# Altium PCB Medusa-AI-coral-dev.PcbDoc (part 2 of 2)
Units mil, origin at the board's own origin, x right, y up, seen from the top; angles counter-clockwise.
Board outline 7750 x 7750 mil, 4 copper layers (Top Layer, Layer 1, Layer 2, Bottom Layer), stack 23.756 mil thick; 116 components, 91 nets, 573 pads, 231 vias.
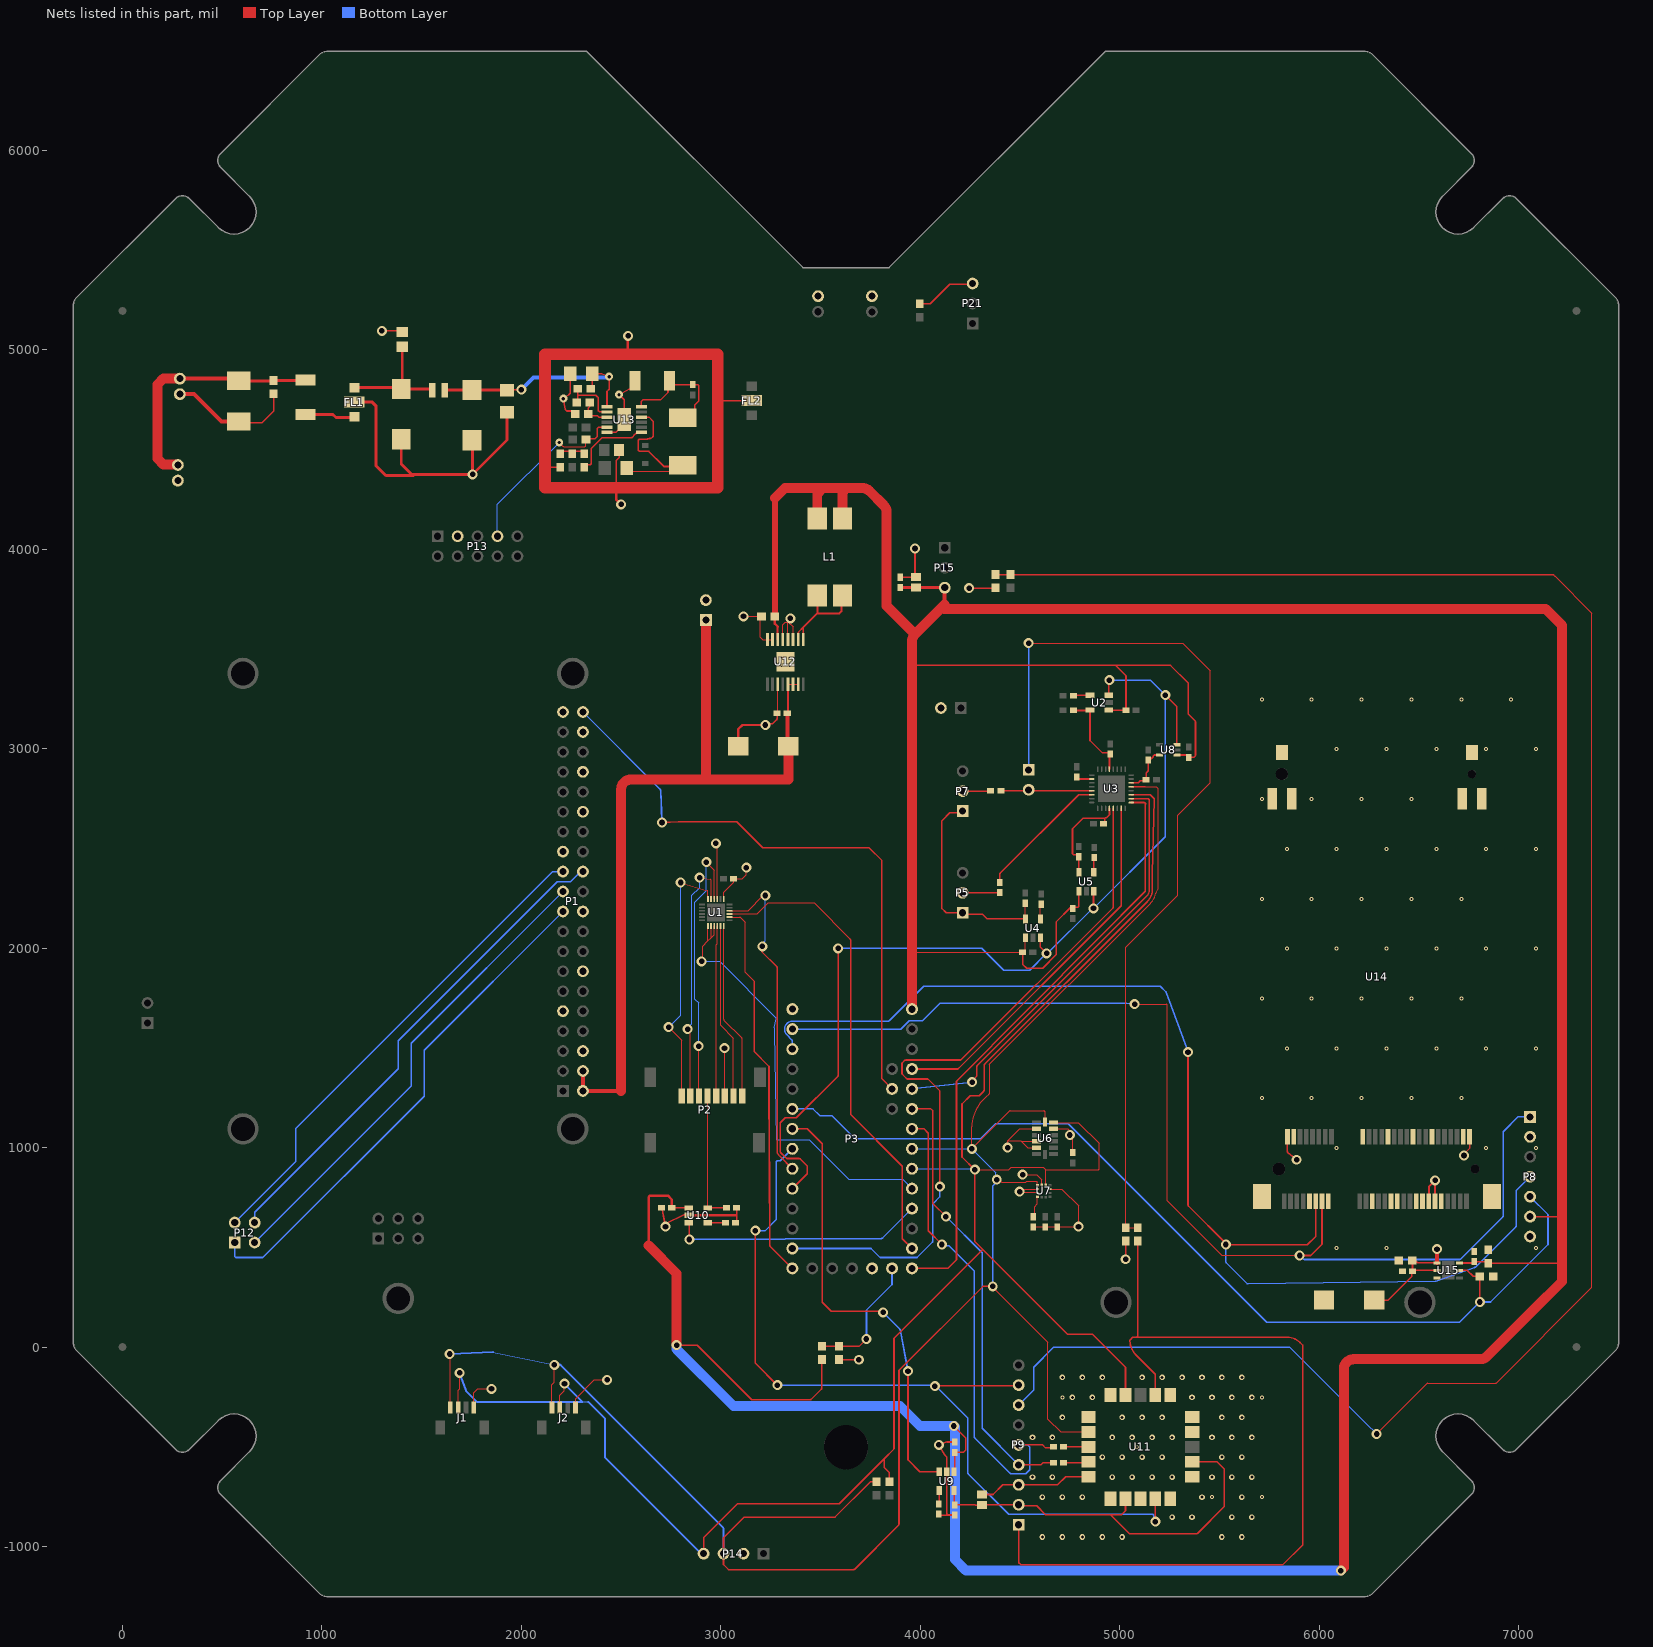
[diagram p4: the nets of this part, all layers, seen from the top]

## Via types
v1: diameter 28, hole 15, Top Layer to Bottom Layer, tented both sides, 61 vias
v2: diameter 50, hole 28, Top Layer to Bottom Layer, tented both sides, 60 vias
v3: diameter 20, hole 10, Top Layer to Bottom Layer, tented both sides, 59 vias
v4: diameter 50, hole 28, Top Layer to Bottom Layer, 40 vias
v5: diameter 40, hole 16, Top Layer to Bottom Layer, tented both sides, 5 vias
v6: diameter 19.68, hole 7.87, Top Layer to Bottom Layer, 4 vias
v7: diameter 38, hole 16, Top Layer to Bottom Layer, tented both sides, 2 vias

## Nets (pads, with @x,y where several pads share a name; then routed paths per layer and width w, separated by ;. In a path a pad name is that pad's centre, name@x,y a point inside that pad or via, vN(x,y) a via of type N, cw(c..) or ccw(c..) an arc to the next point about the centre after c; other vN are vias at no path point) (continued)
DGND: C1.2 C2.1 C3.2 C18.2 C20.1 C21.2 C22.2 C25.2 C26.2 C27.2 C28.2 C29.1 C30.1 C31.1 C34.1 C35.2 C36.2 C37.1 C38.1 C39.1 C40.2 C41.2 C42.1 C43.1 C44.1 C46.1 C47.2 C48.1 C49.2 C50.2 D2.2 D3.A FL1.2_4 FL2.2_4 J1.1 J2.1 P1.6 P1.9 P1.14 P1.20 P1.25 P1.30 P1.34 P1.39 P2.6 P3.GND P4.2 P6.2 P8.7 P9.3 P13.3 P14.2 P20.2 P21.3 P24.2 P25.2 P33.2 R2.1 R4.1 R7.1 R14.1 R16.2 R18.1 U1.13 U1.15 U6.2 U6.4 U6.5 U6.12 U7.2 U7.3 U7.9 U7.12 U9.2 U10.2 U11.1 U11.4 U11.5 U11.6 U11.10 U11.11 U11.15 U11.16 U11.20 U12.3 U12.4 U12.5 U12.7 U12.8 U12.11 U12.17 U13.6 U13.13 U14.4 U14.9 U14.15 U14.18 U14.21 U14.26 U14.27 U14.29 U14.34 U14.35 U14.37 U14.40 U14.43 U14.50 U14.53 U14.54 U14.S1_1 U14.S1_2 U14.S1_3 U14.S2_1 U14.S2_2 U14.S2_3 U15.3 | length 10133
  Top Layer w6: J1.1@1761.5,-303.94 1761.5,-228.5 1780,-210 v4(1850,-210) ; J2.1@2271.26,-303.94 2271.26,-258.74 2365,-165 v4(2430,-165) ; v2(2975,2525) 2980.68,2519.32 cw(c2976.44,2515.07) 2982.44,2515.07 U1.15@2982.44,2247.36 ; U1.13@3013.94,2247.36 3013.94,2279.53 3063.9,2329.49 C1.2@3063.9,2348.9 3108.31,2348.9 3128.31,2368.9 v2(3128.31,2403.9) ; v2(3018.31,1498.9) 3018.31,1260.51 P2.6@3019.92,1258.9 ; v4(3113.31,3663.9) 3202.44,3663.9 C37.1@3203.98,3662.36 3198.31,3656.69 3198.31,3558.9 3209.84,3547.36 U12.8@3233.9,3547.36 U12.7@3259.49,3547.36 ; C36.2@3281.85,3177.36 3285.08,3180.59 U12.11@3285.08,3322.95 ; U12.5@3310.67,3547.36 3310.67,3621.26 3323.31,3633.9 v4@3338.31,3633.9 ; U12.4@3336.26,3547.36 3336.26,3631.85 v4@3338.31,3633.9 ; v4(3348.31,3653.9) 3343.51,3639.96 cw(c3337.84,3641.91) 3342.08,3637.67 v4@3338.31,3633.9 ; U12.3@3361.85,3547.36 3361.85,3610.35 v4@3338.31,3633.9 ; v2(4438.31,1000) 4438.31,1033.9 ; v2@4503.31,858.9 4508.31,858.9 v2(4513.31,863.9) 4583.31,863.9 4609.09,838.11 U7.12@4609.09,813.7 ; C20.1@4567.44,601.77 C22.2@4627.44,601.77 C21.2@4687.44,601.77 4689.57,603.9 v2(4793.31,603.9) 4793.31,707.64 4708.9,792.05 U7.9@4650.43,792.05 ; U6.5@4582.44,999.37 4537.83,999.37 4506.34,1030.87 ; U6.4@4582.44,1030.87 4506.34,1030.87 ; U6.2@4582.44,1093.86 4498.27,1093.86 4438.31,1033.9 ; U7.3@4587.44,772.36 4584.54,775.27 4501.94,775.27 v2(4498.31,778.9) 4511.46,792.05 U7.2@4587.44,792.05 ; U6.12@4668.86,1093.86 4738.35,1093.86 4763.31,1068.9 v2@4763.31,1063.15 ; v2(4750.1,1063.15) v2@4763.31,1063.15 ; C18.2@4763.31,974.49 v2@4763.31,1063.15 ; 4438.31,1033.9 4503.31,1033.9 4506.34,1030.87
  Top Layer w8: D2.2@555,4635 700,4635 757.44,4692.44 C42.1@757.44,4778.9 ; v4(1300,5095) 1397.2,5095 C43.1@1402.44,5089.76 ; C41.2@1752.44,4546.38 C41.2@1755,4543.82 ; 2097.91,4410 2099.45,4411.54 R14.1@2195,4411.54 ; C39.1@2244.88,4875 2244.88,4782.33 2239.23,4776.68 cw(c2233.59,4782.35) 2238.34,4775.91 v5(2210,4755) 2219.44,4702.56 ccw(c2227.31,4704) 2221.63,4698.37 2226.95,4693.05 2253.29,4693.05 R7.1@2268.98,4677.36 ; U13.6@2429,4586 2474.5,4586 2515,4626.5 U13.13@2515,4650 2515,4750 v5(2490,4775) D3.A@2541.66,4803.41 ; 2475,4329.12 2475,4445 2489.84,4459.84 C46.1@2489.84,4497.36 C46.1@2475,4482.52 ; 2530,4972.32 2532.5,4974.82 ; v4@2532.5,5067.5 v4(2535,5070) ; C27.2@2702.72,698.9 2704.92,689.12 ccw(c2712.92,689.12) 2705.07,687.55 v4(2722.44,603.9) v4@2727.57,618.58 ; v4@2727.59,618.61 cw(c2735.13,615.94) 2731.64,623.14 2804.99,658.48 cw(c2824.43,618.28) 2821.52,662.84 U10.2@2839.17,660.43 ; 2964.06,4750 2969.06,4745 FL2.2_4@3155,4745 ; 3073.62,660.43 3078.31,665.12 ; C30.1@3073.9,623.9 3076.55,626.55 ccw(c3070.9,632.21) 3078.9,632.21 3078.9,646.32 ; 3078.9,660.43 3078.9,646.32 ; C28.2@3078.9,698.9 3078.9,646.32 ; v4(3223.31,3118.9) 3230.31,3125.9 3260.31,3125.9 3279.51,3145.1 ccw(c3273.85,3150.75) 3281.85,3150.75 C36.2@3281.85,3177.36 ; R2.1@3591.69,-62.36 3593.23,-63.9 v4(3691.69,-63.9) ; C3.2@3898.31,3859.49 3977.4,3859.49 C2.1@3978.31,3860.4 3973.31,3865.4 v4(3973.31,4003.9) ; C38.1@3997.44,5230.83 4050.24,5230.83 4148.31,5328.9 P21.3@4268.31,5328.9 ; C29.1@4092.44,-838.07 4097.44,-843.07 C26.2@4172.44,-843.07 4170.47,-841.1 4137.13,-841.1 4132.44,-836.42 U9.2@4132.44,-625.24 4132.44,-551.25 4124.38,-543.18 ; 4124.35,-543.16 cw(c4130.03,-537.53) 4123.13,-541.57 v2(4093.31,-491.1) 4133.62,-476.1 4171.65,-476.1 C25.2@4172.44,-476.89 ; v4(4245,3805) 4375.59,3805 R4.1@4376.69,3806.1 R4.1@4371.69,3811.1 ; C31.1@4308.31,-739.6 4364.81,-739.6 4413.31,-691.1 P9.3@4493.31,-691.1 4688.31,-691.1 4728.9,-650.51 U11.15@4843.62,-650.51 ; v2(5030,440) R18.1@5030,531.54 ; U14.S1_2@5744.39,2768.52 U14.S1_2@5764.02,2748.9 ; C48.1@6398.98,433.9 6400.95,433.9 C48.1@6416.85,417.99 ; C49.2@6416.85,378.9 6417.66,378.9 C49.2@6427.44,369.12 ; U14.35@6486.46,731.18 U14.35@6489.45,728.19 ; U14.S2_3@6815.2,2748.9 6827.44,2761.14 U14.S2_3@6822.44,2766.14 ; C34.1@6839.57,479.49 C34.1@6847.44,487.36 ; U14.54@6866.38,737.09 U14.54@6866.38,754.8 ; R16.2@6872.43,354.31 R16.2@6872.85,353.9 ; P8.7@7049.57,553.9 P8.7@7057.44,553.9
  Top Layer w12: 2475,4329.12 2475,4250 v4(2500,4225) ; 2532.5,4974.82 v4@2532.5,5067.5 ; U10.2@2844.17,660.43 3073.62,660.43 ; C35.2@3086.46,3012.36 3086.46,3097.05 3108.31,3118.9 v4(3223.31,3118.9)
  Top Layer w15: FL1.2_4@1162.44,4737.36 1252.64,4737.36 1270,4720 1270,4420 1320,4370 1460,4370 ; C40.2@1397.44,4551.38 1397.44,4427.56 1450,4375 v4(1755,4375) ; C41.2@1755,4543.82 v4(1755,4375) ; C44.1@1927.44,4687.24 1927.44,4547.44 v4(1755,4375)
  Top Layer w20: P25.2@287.44,4777.36 357.64,4777.36 495,4640 D2.2@582.44,4640
  other v1: 4612.44,-952.64 4712.44,-952.64 4812.44,-952.64 4912.44,-952.64 5012.44,-952.64 5512.44,-952.64 5612.44,-952.64 5262.44,-852.64 5362.44,-852.64 5562.44,-852.64 5662.44,-852.64 4612.44,-752.64 4712.44,-752.64 4812.44,-752.64 5412.44,-752.64 5612.44,-752.64 4562.44,-652.64 4662.44,-652.64 4962.44,-652.64 5062.44,-652.64 5162.44,-652.64 5262.44,-652.64 5462.44,-652.64 5562.44,-652.64 5662.44,-652.64 4912.44,-552.64 5012.44,-552.64 5112.44,-552.64 5212.44,-552.64 5512.44,-552.64 5612.44,-552.64 4562.44,-452.64 4662.44,-452.64 4962.44,-452.64 5062.44,-452.64 5162.44,-452.64 5262.44,-452.64 5462.44,-452.64 5562.44,-452.64 5662.44,-452.64 4712.44,-352.64 5012.44,-352.64 5112.44,-352.64 5212.44,-352.64 5512.44,-352.64 5612.44,-352.64 4762.44,-252.64 4862.44,-252.64 5362.44,-252.64 5462.44,-252.64 5562.44,-252.64 5662.44,-252.64 4712.44,-152.64 4812.44,-152.64 4912.44,-152.64 5112.44,-152.64 5212.44,-152.64 5312.44,-152.64 5412.44,-152.64 5512.44,-152.64 5612.44,-152.64
  other v3: 5462.44,-752.64 5712.44,-752.64 5087.44,-502.64 4712.44,-252.64 5712.44,-252.64 6087.44,497.36 6337.44,497.36 7087.44,497.36 6087.44,997.36 6837.44,997.36 7087.44,997.36 5712.44,1247.36 5962.44,1247.36 6212.44,1247.36 6462.44,1247.36 6712.44,1247.36 5837.44,1497.36 6087.44,1497.36 6337.44,1497.36 6587.44,1497.36 6837.44,1497.36 7087.44,1497.36 5712.44,1747.36 5962.44,1747.36 6212.44,1747.36 6462.44,1747.36 6712.44,1747.36 5837.44,1997.36 6087.44,1997.36 6337.44,1997.36 6587.44,1997.36 6837.44,1997.36 7087.44,1997.36 5712.44,2247.36 5962.44,2247.36 6212.44,2247.36 6462.44,2247.36 6712.44,2247.36 5837.44,2497.36 6087.44,2497.36 6337.44,2497.36 6587.44,2497.36 6837.44,2497.36 7087.44,2497.36 5712.44,2747.36 5962.44,2747.36 6212.44,2747.36 6462.44,2747.36 6087.44,2997.36 6337.44,2997.36 6587.44,2997.36 6837.44,2997.36 7087.44,2997.36 5712.44,3247.36 5962.44,3247.36 6212.44,3247.36 6462.44,3247.36 6712.44,3247.36 6962.44,3247.36
  other v6: 3301.81,3413.5 3345.12,3413.5 3301.81,3456.81 3345.12,3456.81
FAULT: P13.7 R8.2 U13.5 | length 915
  Top Layer w6: v7(2190,4535.12) 2190,4535 2208.24,4516.76 ccw(c2212.49,4521) 2212.49,4515 2317.5,4515 ccw(c2317.46,4521) 2323.46,4521 R8.2@2323.46,4550
  Top Layer w8: R8.2@2333.46,4555 2370,4555 2380,4565 2380,4605 2386.6,4611.6 U13.5@2429,4611.6
  Bottom Layer w6: P13.7@1880,4065 1880,4225.12 v7(2190,4535.12)
GPS_EN: P3.5 U9.3 | length 2261.1
  Top Layer w8: P3.5@3358.31,1093.9 3433.31,1093.9 3508.31,1018.9 3508.31,227.21 ccw(c3516.31,227.21) 3510.65,221.55 3553.31,178.9 3808.31,178.9 v4(3813.31,173.9) ; v4(3938.31,-121.1) 3938.34,-562.82 ccw(c3946.34,-562.82) 3940.65,-568.45 3997.44,-625.24 U9.3@4095.04,-625.24
  Bottom Layer w8: v4(3813.31,173.9) 3896.57,90.64 ; 3896.59,90.62 cw(c3890.91,84.98) 3898.77,86.48 v4(3938.31,-121.1)
GPS_PIN: P3.6 P9.8 U11.19 | length 4238
  Top Layer w8: v4(3173.31,583.9) 3173.31,-81.1 v2(3283.31,-191.1) ; v2(4073.31,-196.1) 4075.81,-193.6 4490.81,-193.6 P9.8@4493.31,-191.1 ; v2(5178.31,-876.1) 5178.31,-760.79 U11.19@5178.27,-760.75
  Bottom Layer w8: v4(3173.31,583.9) 3223.31,583.9 3278.31,638.9 3278.31,929.21 3282.99,933.9 3298.31,933.9 P3.6@3358.31,993.9 ; v2(3283.31,-191.1) 4073.51,-191.1 4238.31,-355.9 4238.31,-630.85 ccw(c4246.31,-630.79) 4240.61,-636.41 4440.97,-836.77 ccw(c4446.62,-831.1) 4446.62,-839.1 5163.31,-839.1 cw(c5163.31,-847.1) 5171.31,-847.1 5171.31,-869.1 v2(5178.31,-876.1)
GPS_RST: U11.18 | length 0.2
  Top Layer w8: U11.18@5103.31,-760.91 U11.18@5103.46,-760.75
HYDRO_EN: P3.8 U2.3 U4.3 U5.3 U8.3 | length 4993.6
  Top Layer w8: P3.8@3358.31,793.9 3430.99,866.58 ccw(c3425.31,872.21) 3433.31,872.21 3433.31,904.72 ccw(c3425.31,904.72) 3430.96,910.37 3398.68,942.66 ccw(c3393.02,937) 3393.02,945 3333.31,945 cw(c3333.31,953) 3327.66,947.34 3300.64,974.36 cw(c3306.31,980.01) 3298.31,980.01 3298.31,1123.9 3323.31,1148.9 3378.31,1148.9 3585.96,1356.55 ccw(c3580.31,1362.21) 3588.31,1362.21 v2(3588.31,1998.9) ; U4.3@4601.73,2051.81 4601.73,2005.47 v2(4633.31,1973.9) ; v2(4868.31,2198.9) 4868.31,2283.58 U5.3@4869.84,2285.12 ; U2.3@4945.55,3268.17 4945.55,3341.14 v2(4948.31,3343.9) ; v2(5228.31,3268.9) 5286.61,3210.59 U8.3@5286.61,3019.49
  Bottom Layer w8: v2(3588.31,1998.9) 4308.31,1998.9 4418.31,1888.9 4548.31,1888.9 v2(4633.31,1973.9) 4638.31,1973.9 4863.31,2198.9 v2(4868.31,2198.9) 5228.31,2558.9 v2(5228.31,3268.9) 5153.31,3343.9 v2(4948.31,3343.9)
I2SDIN: P3.22 U3.26 | length 2176
  Top Layer w8: v2(4259.51,1327.9) 4281.69,1357.27 ccw(c4275.31,1362.09) 4283.31,1362.09 4283.31,1405.58 cw(c4291.31,1405.58) 4285.65,1411.24 5136.33,2261.92 ccw(c5109.4,2288.9) 5147.52,2288.92 5147.52,2741.64 5147.52,2741.7 ccw(c5139.52,2741.6) 5145.08,2747.35 5145,2747.44 ccw(c5139.43,2741.68) 5142.96,2748.87 ccw(c5139.44,2741.68) 5139.53,2749.68 5139.48,2749.68 U3.26@5056.73,2749.68
  Bottom Layer w8: P3.22@3958.31,1293.9 v2(4259.51,1327.9)
I2SDOUT: P3.13 U3.25 | length 2997.1
  Top Layer w8: P3.13@3958.31,393.9 4138.31,393.9 4181.31,436.9 4181.31,1329.77 cw(c4189.31,1329.73) 4183.65,1335.39 4886.57,2043.03 5128.31,2284.76 5128.31,2721.28 5128.31,2723.91 ; U3.25@5056.73,2730 5122.22,2730 cw(c5122.22,2722) 5130.19,2721.28
IN_L: C17.2 U3.14 | length 669.5
  Top Layer w8: C17.2@4398.31,2329.49 4398.31,2370.62 cw(c4406.31,2370.58) 4400.62,2376.21 4793.78,2769.37 U3.14@4859.88,2769.37
IN_R: C19.2 P10.2 U3.13 | length 456
  Top Layer w8: C19.2@4403.9,2788.9 4533.31,2788.9 4533.4,2788.99 4859.82,2788.99 U3.13@4859.88,2789.06
IR_SLEEP: P3.4 P8.5 R16.1 U15.5 | length 4974.6
  Top Layer w8: U15.5@6703.94,383.9 6742.44,383.9 6772.03,354.31 R16.1@6805.5,354.31 v2(6805.5,225.84)
  Bottom Layer w8: P3.4@3358.31,1193.9 3462.44,1193.9 3497.44,1158.9 3557.44,1158.9 3672.44,1043.9 4302.44,1043.9 4377.44,1118.9 4739.13,1118.9 cw(c4739.13,1110.9) 4744.77,1116.57 5735.1,126.24 ccw(c5740.75,131.9) 5740.75,123.9 6700.25,123.9 ccw(c6700.25,131.9) 6705.91,126.24 v2(6805.5,225.84) 6859.38,225.84 7147.44,513.9 7147.44,663.9 P8.5@7057.44,753.9
LRCLK: P3.23 U3.23 | length 1875.6
  Top Layer w8: P3.23@3958.31,1393.9 4185.58,1393.9 ccw(c4185.58,1401.9) 4191.23,1396.23 5005.21,2210.21 ccw(c4999.52,2215.83) 5007.52,2215.83 U3.23@5007.52,2700.47
MCLK: P3.11 U3.21 | length 3683
  Top Layer w8: 3926.58,1438.9 ccw(c3926.62,1430.9) 3920.98,1436.57 3910.65,1426.24 ccw(c3916.31,1420.58) 3908.31,1420.58 3908.31,1372.15 ccw(c3916.31,1372.21) 3910.61,1366.59 3931.01,1346.2 ccw(c3936.62,1351.9) 3936.56,1343.9 4038.31,1343.9 4098.31,1283.9 v2(4098.31,803.9) ; 3926.62,1438.9 4199.99,1438.9 ccw(c4199.99,1446.9) 4205.64,1441.23 4965.84,2201.43 ccw(c4960.15,2207.05) 4968.15,2207.05 U3.21@4968.15,2700.47
  Bottom Layer w8: P3.11@3358.31,493.9 3753.31,493.9 3798.31,448.9 3983.31,448.9 4060.96,526.55 ccw(c4055.31,532.21) 4063.31,532.21 4063.31,715.58 cw(c4071.31,715.58) 4065.64,721.23 4095.99,751.58 ccw(c4090.31,757.21) 4098.31,757.21 v2(4098.31,803.9)
MISO: P3.12 U1.8 | length 1921.5
  Top Layer w6: U1.8@3042.68,2155.63 3094.09,2155.63 cw(c3094.09,2149.63) 3098.3,2153.91 3121.57,2130.64 cw(c3117.31,2126.41) 3123.31,2126.41 3123.31,1878.9 3168.31,1833.9
  Top Layer w8: 3168.31,1833.9 3168.31,1480.18 3241.59,1406.9 3241.59,1350.33 3245.65,509.81 ccw(c3253.65,509.87) 3247.97,504.23 P3.12@3358.31,393.9
MOSI: P3.7 U1.10 | length 1651.5
  Top Layer w6: U1.10@3042.68,2187.13 3136.54,2187.13 3213.31,2263.9 v2(3223.31,2263.9)
  Top Layer w8: v2(3208.31,2008.9) 3206.21,2006.8 3206.21,1980.99 3280.93,1906.27 3280.97,1906.23 cw(c3275.25,1900.64) 3283.25,1900.63 3282.31,1123.92 3282.31,980.01 ccw(c3306.31,980.01) 3289.14,963.24 3297.34,954.86 P3.7@3358.31,893.9
  Bottom Layer w6: v2(3208.31,2008.9) 3208.31,2020.8 3223.31,2035.8 v2(3223.31,2263.9)
NetAv: P8.2
NetC7_1: C7.1 U2.4 | length 84.3
  Top Layer w8: C7.1@4767.36,3266.63 4768.9,3268.17 U2.4@4851.06,3268.17
NetC12_1: C12.1 U4.4 | length 75.1
  Top Layer w6: U4.4@4601.73,2146.3 4601.73,2216.54 C12.1@4605.2,2220
NetC13_1: C13.1 U3.10 | length 81
  Top Layer w8: C13.1@4783.31,2858.31 4783.31,2857.89 4793.09,2848.11 U3.10@4859.88,2848.11
NetC16_1: C16.1 U5.4 | length 75.1
  Top Layer w8: U5.4@4869.84,2379.61 4869.84,2449.84 C16.1@4873.31,2453.31
NetC17_1: C17.1 P5.2 | length 186.3
  Top Layer w8: P5.2@4212.44,2277.36 4397.36,2277.36 C17.1@4398.31,2278.31
NetC19_1: C19.1 P7.2 | length 140.9
  Top Layer w8: P7.2@4212.44,2787.36 4351.18,2787.36 C19.1@4352.72,2788.9
NetC20_2: C20.2 U7.4 | length 108
  Top Layer w6: C20.2@4567.44,652.95 4573.31,658.82 4573.31,703.9 4587.44,718.03 U7.4@4587.44,752.68
NetC29_2: C29.2 U9.4 | length 68.2
  Top Layer w8: C29.2@4092.44,-786.89 4095.04,-784.29 U9.4@4095.04,-719.72
NetC30_2: C30.2 U10.4 | length 89.4
  Top Layer w8: U10.4@2933.66,623.03 3021.85,623.03 C30.2@3022.72,623.9
NetC32_1: C32.1 U11.14 | length 127
  Top Layer w8: C32.1@4718.9,-581.1 4838.23,-581.1 U11.14@4843.62,-575.71
NetC33_1: C33.1 U11.13 | length 124.8
  Top Layer w8: C33.1@4718.9,-501.1 4843.43,-501.1 U11.13@4843.62,-500.91
NetC40_1: C40.1 C43.2 FL1.3 L2.1 | length 609
  Top Layer w8: C40.1@1390.59,4810.2 C40.1@1397.44,4803.35 C40.1@1402.44,4808.35 ; L2.1@1546.46,4803.35 L2.1@1552.44,4797.36
  Top Layer w15: FL1.3@1162.44,4810.2 C40.1@1390.59,4810.2 ; C40.1@1397.44,4803.35 L2.1@1546.46,4803.35 ; C40.1@1402.44,4808.35 C43.2@1402.44,5014.96
NetD1_K: D1.K FL1.1 | length 253.4
  Top Layer w8: FL1.1@1157.91,4660 FL1.1@1162.44,4664.53
  Top Layer w15: D1.K@917.44,4675.75 1054.25,4675.75 1070,4660 FL1.1@1157.91,4660
NetL1_1: L1.1 U12.1 U12.2 | length 529.2
  Top Layer w6: U12.2@3387.44,3547.36 3387.44,3580.55 cw(c3393.44,3580.55) 3389.18,3584.77
  Top Layer w8: 3389.18,3584.77 3413.03,3608.62 U12.1@3413.03,3547.36
  Top Layer w10: 3413.03,3608.62 3483.31,3678.9 ; L1.1@3483.31,3768.9 3483.31,3678.9 ; L1.1@3609.29,3768.9 3605,3764.61 3605,3690 3593.9,3678.9 3483.31,3678.9
NetR12_1: R12.1 R13.2 R14.2 | length 120
  Top Layer w8: R14.2@2197.44,4490.83 2255,4490.83 R12.1@2317.44,4490.83
PGM: P3.PGM
PI_STATUS: P1.40 P3.A10 | length 3064.3
  Top Layer w8: v4(2705,2630) 2787.25,2633.89 cw(c2787.63,2625.9) 2787.63,2633.9 3079.94,2633.9 3209.94,2503.9 3742.44,2503.9 3807.44,2438.9 3807.44,1344.76 P3.A10@3858.31,1293.9
  Bottom Layer w8: P1.40@2308.31,3183.9 2695.25,2796.96 ; 2695.27,2796.94 cw(c2689.59,2791.3) 2697.58,2791.67 v4(2705,2630)
PI_STATUS2: P1.38 | length 3.4
  Bottom Layer w8: P1.38@2308.31,3083.9 P1.38@2310.7,3086.29
PPS: P9.1 R17.2 U11.7 | length 4354.3
  Top Layer w8: P9.1@4493.31,-891.1 4493.31,-1081.1 4503.31,-1091.1 5818.31,-1091.1 5918.31,-991.1 5918.31,4.91 ; R17.2@5090,531.54 5090,54.1 5085,49.1 ; U11.7@5178.27,-241.06 5178.27,-136.06 5080.81,-38.6 cw(c5153.42,34.01) 5050.79,30.48 cw(c5058.79,30.75) 5053.06,36.34 ccw(c4859.95,226.62) 5064.85,49.1 5085,49.1 ; 5918.31,4.95 ccw(c5910.31,4.91) 5915.94,10.6 5904.05,22.48 ccw(c5839.88,-41.58) 5839.81,49.1 5085,49.1
RX: P3.0 P8.1 U14.13 | length 5754.8
  Top Layer w6: v2(5074.89,1718.9) 5232.31,1718.9 cw(c5232.31,1712.9) 5238.31,1712.9 5238.31,733.03 5510.67,460.67 ccw(c5514.93,464.9) 5514.93,458.9 v4(5902.44,458.9)
  Top Layer w8: v4(5902.44,458.9) 5957.44,458.9 6014.02,515.47 U14.13@6014.02,731.18 U14.13@6012.44,729.61
  Bottom Layer w8: P3.0@3358.31,1593.9 3901.74,1593.9 3944.21,1636.37 4010.78,1636.37 4098.31,1723.9 5033.89,1723.9 cw(c5033.89,1715.9) 5034.87,1723.84 v2(5074.89,1718.9) ; v4(5902.44,458.9) 5920.1,441.24 ccw(c5925.75,446.9) 5925.75,438.9 6704.13,438.9 ccw(c6704.13,446.9) 6709.78,441.24 6920.11,651.57 ccw(c6914.44,657.21) 6922.44,657.21 6922.44,1075.58 cw(c6930.44,1075.58) 6924.78,1081.24 6997.44,1153.9 P8.1@7057.44,1153.9
RXD2: C33.2 P3.20 P9.5 | length 2446.5
  Top Layer w8: P3.20@3958.31,1093.9 4018.31,1093.9 4037.66,1074.55 cw(c4032,1068.89) 4040,1068.89 4040,585.52 ccw(c4048,585.52) 4042.34,579.86 v2(4108.31,513.9) ; P9.5@4493.31,-491.1 4613.31,-491.1 4628.31,-506.1 4662.72,-506.1 C33.2@4667.72,-501.1
  Bottom Layer w8: v2(4108.31,513.9) 4115.31,506.9 4145.31,506.9 4270.81,381.4 4270.81,-450.29 ccw(c4278.81,-450.29) 4273.14,-455.93 4450.99,-633.79 ccw(c4456.62,-628.1) 4456.58,-636.1 4528.31,-636.1 4548.31,-616.1 4548.31,-501.1 4538.31,-491.1 P9.5@4493.31,-491.1
SCK: P3.14 U1.9 | length 2383.9
  Top Layer w6: U1.9@3042.68,2171.38 3182.4,2171.38 3237.92,2226.9 3467.09,2226.9 3648.49,2045.5 3648.49,2044.08
  Top Layer w8: 3648.49,2044.08 3652.07,2040.5 3652.07,1164.27 3910,906.34 3910,542.2 P3.14@3958.31,493.9
SCL: J1.4 J2.4 P3.19 P14.3 R15.1 U3.29 U6.14 U7.1 U11.12 | length 10862.2
  Top Layer w6: v4(1640,-35) 1643.39,-38.39 J1.4@1643.39,-303.94 ; J2.4@2153.15,-303.94 2153.15,-188.15 2165,-176.3 v4(2165,-90) ; 4342.45,1264.11 ccw(c4453.91,1103.36) 4258.31,1104.34 v2(4258.31,993.9) 4446.57,1182.16 cw(c4450.79,1177.9) 4450.79,1183.9 4619.65,1183.9 cw(c4619.65,1177.9) 4625.65,1177.9 U6.14@4625.65,1129.19 ; 4342.47,1264.12 ccw(c4339.03,1269.04) 4345.03,1269.06 4344.78,1412.28 cw(c4350.78,1412.29) 4346.52,1416.52 5152.36,2222.36 ccw(c5080.67,2294.34) 5180.55,2275.77 cw(c5220.84,2267.74) 5191.59,2296.59 ccw(c5187.31,2300.79) 5193.31,2300.76 ; v4(4363.31,303.9) 4363.31,298.9 4638.31,23.9 4638.31,-361.1 4703.31,-426.1 U11.12@4843.62,-426.1 ; v2(4383.31,838.9) 4395.21,838.9 4408.21,825.9 4529.05,825.9 4533.3,830.15 4583.93,830.15 4587.44,826.64 U7.1@4587.44,811.73 ; 5128.15,2808.74 5183.46,2808.74 5191.55,2800.66 cw(c5187.31,2796.41) 5193.31,2796.41 5193.31,2300.79
  Top Layer w8: R15.1@3780,-676.54 3748.46,-676.54 3572.36,-852.64 3116.77,-852.64 3013.31,-956.1 P14.3@3013.31,-1036.1 3013.31,-1091.1 3038.31,-1116.1 3664.99,-1116.1 ccw(c3664.99,-1108.1) 3670.64,-1113.77 3890.99,-893.42 ccw(c3885.31,-887.79) 3893.31,-887.79 3893.31,-116.61 4313.81,303.9 v4(4363.31,303.9) ; U3.29@5056.73,2808.74 5128.15,2808.74
  Bottom Layer w6: 1857.44,-26.1 v4(2165,-90) ; 3011.57,-905.23 cw(c3007.31,-909.45) 3013.31,-909.45 ; P3.19@3958.31,993.9 v2(4258.31,993.9) 4379.31,872.9 4379.31,842.9 v2(4383.31,838.9)
  Bottom Layer w8: v4(4363.31,303.9) 4363.31,807.53 4383.31,827.53 v2(4383.31,838.9)
  Bottom Layer w10: v4(1640,-35) 1857.44,-26.1 ; v4(2165,-90) 2190.64,-88.89 cw(c2191.07,-98.88) 2198.14,-91.81 3011.55,-905.21 ; P14.3@3013.31,-1036.1 3013.31,-909.45
SD1: P2.1 U1.18 | length 1310.4
  Top Layer w6: v2(2738.31,1603.9) 2803.39,1538.82 P2.1@2803.39,1258.9 ; v2(2798.31,2328.9) 2930.95,2288.31 cw(c2929.2,2282.57) 2935.2,2282.57 U1.18@2935.2,2247.36
  Bottom Layer w6: v2@2733.31,1598.9 v2(2738.31,1603.9) 2798.31,1663.9 v2(2798.31,2328.9)
SD2: P2.2 U1.17 | length 1255
  Top Layer w6: P2.2@2846.69,1258.9 v2@2846.69,1575.51 ; v2(2893.31,2353.9) 2945.94,2345.05 cw(c2944.94,2339.13) 2950.95,2339.13 U1.17@2950.95,2247.36
  Bottom Layer w6: v2(2833.31,1593.9) 2833.31,1601.98 2853.31,1621.98 2853.31,2263.9 2893.31,2303.9 v2(2893.31,2353.9)
SD3: P2.3 U1.16 | length 1403.4
  Top Layer w6: P2.3@2890,1258.9 v2@2890,1508.9 ; v2(2927.34,2430.73) 2966.69,2391.38 U1.16@2966.69,2247.36
  Bottom Layer w6: v2(2888.31,1508.9) 2888.31,1724.89 2869.31,1743.89 2869.31,2229.9 2927.34,2287.93 v2(2927.34,2430.73)
SD5: P2.5 U1.4 | length 854.7
  Top Layer w6: P2.5@2976.61,1258.9 2976.61,2016.61 2982.44,2022.44 U1.4@2982.44,2111.14
SD7: P2.7 U1.5 | length 879.2
  Top Layer w6: U1.5@2998.19,2111.14 2998.19,1612.05 3063.23,1547.01 P2.7@3063.23,1258.9
SD8: P2.8 U1.6 | length 890.1
  Top Layer w6: U1.6@3013.94,2111.14 3013.94,1643.55 ccw(c3019.94,1643.55) 3015.69,1639.31 3104.8,1550.2 cw(c3100.54,1545.98) 3106.54,1545.98 P2.8@3106.54,1258.9
SD_EN: P3.16 U10.3 | length 1262
  Top Layer w8: v4(2842.44,538.9) 2842.44,614.24 U10.3@2844.17,623.03
  Bottom Layer w8: v4(2842.44,538.9) 3805.05,543.88 ccw(c3804.98,551.88) 3810.63,546.22 P3.16@3958.31,693.9
SD_SWITCH: P3.17 U1.1 U1.2 U1.3 | length 2221.7
  Top Layer w6: v2(2903.31,1933.9) 2908.31,1938.9 2908.31,2008.9 2935.2,2035.79 ; U1.1@2935.2,2111.14 2935.2,2035.79 ; U1.2@2950.95,2111.14 2950.95,2051.54 ; U1.3@2966.69,2111.14 2966.69,2067.28 2950.95,2051.54 ; 2935.2,2035.79 2950.95,2051.54
  Bottom Layer w6: v2(2903.31,1933.9) 2993.31,1933.9 3275.55,1651.66 ; 3275.61,1651.59 cw(c3271.27,1647.45) 3277.17,1646.35 3268.56,1600.25 ccw(c3369.94,1581.32) 3266.83,1579.3 3277.31,1044.93 cw(c3271.31,1044.79) 3277.31,1044.85 ccw(c3283.31,1044.9) 3283.31,1038.9 3443.31,1038.9 3641.22,840.99 3911.22,840.99 P3.17@3958.31,793.9
SDA: J1.3 J2.3 P3.18 P14.4 R5.1 U3.27 U6.13 U7.11 U11.9 | length 10079.9
  Top Layer w6: J1.3@1682.76,-303.94 1682.76,-217.24 1690,-210 v4(1690,-130) ; J2.3@2192.52,-303.94 2192.52,-242.48 2215.88,-219.12 v4(2215.88,-184.12) ; v2(4273.31,888.9) 4443.76,888.9 4456.76,901.9 4615.31,901.9 4628.31,888.9 ; U7.11@4628.78,813.7 4628.78,888.42 4628.31,888.9 ; U6.13@4668.86,1125.35 4791.85,1125.35 4896.55,1020.66 cw(c4892.31,1016.41) 4898.31,1016.41 4898.31,894.9 cw(c4892.31,894.9) 4892.31,888.9 4628.31,888.9
  Top Layer w8: P14.4@2913.31,-1036.1 2913.31,-956.1 3083.31,-786.1 3593.31,-786.1 3819.7,-559.7 ; R5.1@3845,-676.54 3845,-630 3819.7,-604.7 3819.7,-559.7 ; U11.9@5028.66,-241.06 5028.66,-101.46 4863.31,63.9 4738.31,63.9 4313.31,488.9 ; U3.27@5056.73,2769.37 5149.98,2769.37 cw(c5149.98,2761.37) 5155.63,2767.03 5168.31,2754.35 5169.96,2752.7 5170,2752.66 cw(c5164.28,2747.06) 5172.28,2746.88 5163.52,2373.61 ; 5163.52,2373.57 ccw(c5171.52,2373.43) 5163.52,2373.47 5163.52,2288.94 cw(c5109.4,2288.9) 5157.35,2263.8 ccw(c5164.46,2260.14) 5156.92,2262.82 cw(c5081.93,2289.49) 5138.13,2233.13 4322.37,1417.37 ccw(c4328,1411.69) 4320,1411.73 4320,1288.31 cw(c4312,1288.31) 4317.66,1282.66 4295,1260 4250.34,1260 4209.31,1218.97 4209.31,952.9 v2(4273.31,888.9) 4273.31,528.9 4313.31,488.9 ; 3819.7,-559.7 3868.31,-511.1 3868.31,43.9 4313.31,488.9
  Bottom Layer w6: 2305.22,-275.22 2334.89,-275.22 ; P14.4@2901.1,-1036.1 P14.4@2913.31,-1036.1 ; P3.18@3958.31,893.9 v2@4278.31,893.9
  Bottom Layer w10: v4(1690,-130) 1721.36,-218.62 ccw(c1730.77,-215.25) 1722.26,-220.5 1722.34,-220.62 ccw(c1730.85,-215.36) 1723.75,-222.41 ; 1723.75,-222.42 1776.56,-275.22 2305.22,-275.22 2246.82,-216.82 ; v4(2215.88,-184.12) 2246.62,-216.61 ccw(c2253.92,-209.78) 2246.81,-216.81 ; 2334.89,-275.22 2420,-360.33 2420,-555 P14.4@2901.1,-1036.1
SENSE: L3.2 R11.1 U13.10 | length 819.5
  Top Layer w6: R11.1@2527.56,4407.36 2544.92,4390 2779.09,4390 L3.2@2810,4420.91
  Top Layer w8: U13.10@2601,4662.8 2639.57,4662.8 2660,4642.37 2660,4568 2660,4567.94 cw(c2652,4568.06) 2656.49,4561.44 2649.47,4556.67 cw(c2644.98,4563.29) 2644.98,4555.29 2641.74,4555.29 ccw(c2641.78,4547.29) 2638.59,4554.63 cw(c2628.5,4577.5) 2628.5,4552.5 2594.52,4552.5 ccw(c2594.56,4544.5) 2587.63,4548.5 cw(c2573.52,4556.35) 2586.55,4546.82 ccw(c2593,4542.09) 2585,4542.13 2585,4500.34 ccw(c2593,4500.34) 2593,4492.34 2633.09,4492.34 cw(c2633.09,4484.34) 2634.32,4492.25 cw(c2633.18,4484.33) 2635.73,4491.91 2635.83,4491.88 cw(c2633.28,4484.3) 2637.24,4491.25 2637.3,4491.21 2637.36,4491.18 cw(c2633.3,4484.28) 2638.87,4490.03 2638.92,4489.98 2708.25,4420.65 2713.9,4415 L3.2@2795,4415
SOLAR_SHDN: R7.2 R9.2 U13.3 | length 159.9
  Top Layer w8: R9.2@2343.46,4735 2343.46,4716.97 2335.91,4709.41 R7.2@2335.91,4677.36 2343.27,4670 2380,4670 2387.2,4662.8 U13.3@2429,4662.8
SOLAR_SW: C45.2 D3.K L3.1 U13.12 | length 620.7
  Top Layer w6: D3.K@2735,4838.39 D3.K@2741.61,4845 D3.K@2761.02,4825.59 ; L3.1@2815,4659.09 2826.74,4659.09 L3.1@2870,4702.35
  Top Layer w8: U13.12@2601,4714 2601,4741 2610.59,4750.59 2699.38,4750.59 2735,4786.21 D3.K@2735,4838.39 ; D3.K@2746.61,4830 2757.66,4818.96 cw(c2752,4813.3) D3.K@2760,4813.3 ; D3.K@2761.02,4825.59 C45.2@2860,4825.59 2884.41,4825.59 2890,4820 2890,4745 2870,4725 L3.1@2870,4702.35
SOLAR_VIN: C39.2 C41.1 C44.2 L2.2 R10.1 U13.1 | length 1162.2
  Top Layer w8: C41.1@1751.46,4797.36 C41.1@1752.44,4798.35 ; C44.2@1926.58,4798.35 C44.2@1927.44,4797.48 1929.96,4800 v4(2000,4800) ; R10.1@2348.46,4805 2355.12,4811.65 C39.2@2355.12,4875 ; C39.2@2355.12,4880 2399.69,4880 cw(c2399.69,4872) 2402.57,4879.46 v5(2440,4865) ; U13.1@2429,4714 2429,4791 2440,4802 v5@2440,4860
  Top Layer w15: L2.2@1615.43,4797.36 C41.1@1751.46,4797.36 ; C41.1@1752.44,4798.35 C44.2@1926.58,4798.35
  Bottom Layer w20: v4(2000,4800) 2060,4860 v5@2440,4860
SOLAR_VIN_REG: R9.1 R10.2 U13.2 | length 292.6
  Top Layer w8: R9.1@2276.54,4735 2281.54,4740 2281.54,4772.5 ; R10.2@2281.54,4805 2281.54,4772.5 ; U13.2@2429,4688.4 2391.6,4688.4 2385,4695 2385,4760.31 2380.31,4765 2380,4765 2372.5,4772.5 2281.54,4772.5
SPI_CLK: P1.23 P12.2 | length 2471.2
  Bottom Layer w8: P12.2@562.44,623.9 867.44,928.9 867.44,1093.9 2155.11,2381.57 cw(c2160.76,2375.9) 2160.71,2383.9 ; 2160.75,2383.9 P1.23@2208.31,2383.9
SPI_CSB: P1.24 P12.4 | length 2487.1
  Bottom Layer w8: P12.4@662.44,623.9 662.44,675.81 1382.44,1395.81 1382.44,1535.4 2179.19,2332.15 2245.69,2332.15 2297.44,2383.9 P1.24@2308.31,2383.9
SPI_MI: P1.21 P12.3 | length 2400.3
  Bottom Layer w8: P12.3@662.44,523.9 1447.44,1308.9 1447.44,1523.03 P1.21@2208.31,2283.9
SPI_MO: P1.19 P12.1 | length 2571.4
  Bottom Layer w8: P12.1@562.44,523.9 562.44,453.9 567.44,448.9 703.45,448.9 1512.44,1257.89 1512.44,1488.03 P1.19@2208.31,2183.9
TX: P3.1 P8.4 U14.11 | length 6102.8
  Top Layer w8: v4(5342.44,1478.9) 5342.44,712.21 ccw(c5350.44,712.21) 5344.77,706.57 5536.81,514.53 ccw(c5542.44,520.21) 5542.4,512.21 5940.75,512.21 5982.52,553.98 U14.11@5982.52,731.18
  Bottom Layer w8: P3.1@3358.31,1493.9 3358.31,1534.02 ccw(c3350.31,1534.02) 3356.11,1539.52 3330,1567.07 cw(c3358.31,1593.9) 3358.23,1632.9 3838.44,1633.9 ccw(c3838.42,1641.9) 3844.08,1636.24 4016.74,1808.9 5203.31,1808.9 5232.05,1780.15 ; 5232.07,1780.13 cw(c5226.4,1774.5) 5233.91,1777.23 v4(5342.44,1478.9) ; v4(5532.44,513.9) 5532.44,427.21 ccw(c5540.44,427.21) 5534.78,421.55 5637.53,318.8 ; 5637.56,318.78 ccw(c5643.19,324.46) 5643.27,316.46 6583.16,329.72 ccw(c6583.01,337.72) 6585.69,330.18 6777.46,398.29 cw(c6780.15,390.75) 6778.14,398.5 cw(c6780.15,390.75) 6779.54,398.73 ccw(c6778.94,406.71) 6784.52,400.98 ; 6784.56,401.01 6985.1,601.55 ccw(c6979.44,607.21) 6987.44,607.21 6987.44,780.58 cw(c6995.44,780.58) 6989.78,786.24 P8.4@7057.44,853.9
TXD2: C32.2 P3.21 P9.4 | length 2240.8
  Top Layer w8: P3.21@3958.31,1193.9 4053.31,1193.9 4063.31,1183.9 4063.31,718.9 v2(4128.31,653.9) ; P9.4@4493.31,-591.1 4603.31,-591.1 4613.31,-581.1 C32.2@4667.72,-581.1
  Bottom Layer w8: v2(4128.31,653.9) 4309.94,472.26 4309.94,-407.74 P9.4@4493.31,-591.1
V_BCKP: P9.7 R3.1 R4.2 | length 10011.9
  Top Layer w6: v2@6277.44,-446.1 6287.87,-435.67 6540.68,-182.86 cw(c6544.93,-187.1) 6544.93,-181.1 6884.96,-181.1 ccw(c6884.96,-175.1) 6889.2,-179.35 7367.44,298.9 7367.44,3678.9 7182.44,3863.9
  Top Layer w8: R4.2@4376.69,3873.03 R3.1@4451.69,3873.03 7173.31,3873.03 7182.44,3863.9
  Bottom Layer w6: 5853.31,-1.1 6233.33,-381.12 v2(6288.31,-436.1)
  Bottom Layer w8: P9.7@4493.31,-291.1 4568.31,-216.1 4568.31,-101.1 4668.31,-1.1 5853.31,-1.1
VA: C5.1 C8.1 U2.5 U3.5 | length 445
  Top Layer w8: C5.1@4767.36,3191.63 4849.33,3191.63 U2.5@4851.06,3193.36 4851.06,3041.14 4913.31,2978.9 4947.72,2978.9 C8.1@4953.31,2973.31 4948.46,2968.46 U3.5@4948.46,2897.32
VCC5: C35.1 C36.1 P1.2 P1.4 P20.1 U12.13 U12.14 U12.15 | length 3981.8
  Top Layer w6: C36.1@3333.03,3177.36 C36.1@3336.26,3180.59 ; U12.13@3336.26,3322.95 U12.14@3361.85,3322.95 U12.15@3387.44,3322.95
  Top Layer w8: C35.1@3333.03,3017.76 C35.1@3338.43,3012.36
  Top Layer w10: C36.1@3336.26,3180.59 U12.13@3336.26,3322.95
  Top Layer w20: P1.4@2308.31,1383.9 P1.2@2308.31,1283.9 2500,1283.9 ; C35.1@3333.03,3017.76 C36.1@3333.03,3177.36
  Top Layer w50: 2500,1283.9 2500,2795.63 cw(c2550,2795.63) 2550,2845.63 2670,2845.63 2915,2845.63 2925,2845.63 ; P20.1@2925,3625 2925,2845.63 ; C35.1@3338.43,3012.36 3338.43,2845.63 2930,2845.63 2925,2845.63
VCC_GPS: C26.1 C31.2 P9.2 U9.5 U11.2 U11.17 | length 2048.8
  Top Layer w8: U9.5@4169.84,-719.72 4169.84,-789.29 C26.1@4172.44,-791.89 4274.09,-791.89 4274.81,-792.6 C31.2@4308.31,-792.6 4309.02,-791.89 4309.81,-791.1 P9.2@4493.31,-791.1 4498.31,-796.1 4583.31,-796.1 4628.31,-841.1 4953.31,-841.1 ; U11.17@5028.66,-760.75 5028.66,-820.75 5008.31,-841.1 4953.31,-841.1 ; U11.2@5363.31,-575.71 5487.91,-575.71 5523.31,-611.1 5523.31,-801.1 5390.65,-933.76 cw(c5384.99,-928.1) 5384.99,-936.1 5051.56,-936.1 cw(c5051.62,-928.1) 5046,-933.8 4953.31,-841.1
VCC_SD: C28.1 P2.4 U10.5 | length 650.7
  Top Layer w6: P2.4@2933.31,1258.9 2933.31,698.19 U10.5@2933.66,697.83
  Top Layer w8: U10.5@2933.66,697.83 3021.65,697.83 C28.1@3022.72,698.9
VCC_TILE: C48.2 C49.1 C50.1 U14.2 U14.39 U14.41 U14.52 U15.1 U15.2 | length 1086.8
  Top Layer w8: U14.2@5840.79,1054.02 5840.79,979.44 ccw(c5848.79,979.44) 5843.86,973.14 v2(5887.44,938.9) ; C50.1@6275.98,235 6345,235 6465,355 6465,375.87 C49.1@6468.03,378.9 ; U15.1@6585.45,423.31 6584.82,423.31 6547.44,423.31 6495.24,423.31 cw(c6495.24,431.31) 6489.59,425.65 6476.34,438.9 6474.37,438.9 6468.03,432.56 C49.1@6468.03,378.9 ; U15.2@6590.95,383.9 6473.03,383.9 C49.1@6468.03,378.9 ; v2@6722.44,963.9 6754.17,995.63 U14.52@6754.17,1054.02
  Top Layer w10: U14.39@6549.45,731.18 6549.45,803.9 v2(6580.95,835.39) ; U14.41@6580.95,731.18 v2@6580.95,822.4
  Top Layer w20: U15.1@6590.95,421.3 v2(6590.95,490.39)
  other v2: 6725.95,960.39
VDDD: C4.1 C24.1 U3.30 U8.5 | length 256
  Top Layer w8: U3.30@5056.73,2828.43 5092.83,2828.43 5103.31,2838.9 5127.72,2838.9 C4.1@5132.72,2843.9 5132.72,2878.31 5143.31,2888.9 C24.1@5143.31,2943.31 5148.9,2948.9 5158.31,2948.9 5168.31,2958.9 5168.31,2963.62 5172.99,2968.31 U8.5@5200,2968.31
VDDIO: C11.1 C14.1 U3.20 U5.5 | length 516.1
  Top Layer w8: U5.5@4795.04,2379.61 4795.04,2457.39 4783.53,2468.9 4767.99,2468.9 4763.31,2473.58 4763.31,2598.9 4814.77,2650.36 4924.77,2650.36 ; C11.1@4918.9,2623.9 4924.77,2629.77 4924.77,2650.36 ; U3.20@4948.46,2700.47 4948.46,2669.06 4933.31,2653.9 4928.31,2653.9 4924.77,2650.36
VFB: R12.2 U13.7 | length 394.7
  Top Layer w8: R12.2@2317.44,4423.9 2342,4423.9 ccw(c2342,4431.9) 2350,4431.9 2350,4505 2405,4560 2552.27,4560 ccw(c2552.27,4568) 2559.49,4564.55 2560.32,4566.28 cw(c2589.2,4552.5) 2573.12,4580.17 2581.29,4584.92 cw(c2585.31,4578) 2585.31,4586 U13.7@2601,4586
VH: C9.1 P5.1 P7.1 U4.5 | length 1083.7
  Top Layer w6: C9.1@4525.2,2225 4526.93,2223.27 U4.5@4526.93,2146.3
  Top Layer w8: P7.1@4212.44,2687.36 4203.98,2678.9 4148.31,2678.9 4108.31,2638.9 4108.31,2198.9 4127.5,2179.71 ccw(c4133.16,2185.36) 4133.16,2177.36 P5.1@4212.44,2177.36 4220.91,2168.9 4313.31,2168.9 4335.91,2146.3 U4.5@4526.93,2146.3
VIN: C2.2 C3.1 C6.1 C10.1 C15.1 C23.1 C25.1 C27.1 C34.2 C37.2 C47.1 L1.2 P3.Vin P8.6 P15.3 R1.2 U2.1 U4.1 U5.1 U8.1 U9.1 U10.1 U12.6 U15.6 | length 24247.4
  Top Layer w6: 3958.31,1968.9 3968.31,1978.9 C10.1@4512.72,1978.9 4516.15,1978.9 4526.93,1989.68 U4.1@4526.93,2051.81
  Top Layer w8: C27.1@2753.9,698.9 2754.96,697.83 U10.1@2839.17,697.83 ; v4(2778.31,8.9) 2881.1,8.9 3155,-265 3446.69,-265 ccw(c3446.69,-257) 3452.33,-262.67 3504.38,-210.62 ccw(c3498.69,-204.99) 3506.69,-204.99 R1.2@3506.69,-62.36 ; C3.1@3898.31,3808.31 C3.1@3899.25,3807.36 ; 3958.31,3417.36 4979.84,3417.36 ; v2(4168.31,-396.1) 4228.31,-456.1 4228.31,-516.1 4216.34,-528.07 C25.1@4172.44,-528.07 4172.44,-622.64 U9.1@4169.84,-625.24 ; C10.1@4512.72,1978.9 4512.72,1919.49 4533.31,1898.9 4613.51,1898.9 4680.91,1966.3 4680.91,2131.5 4753.9,2204.49 4787.04,2204.49 ccw(c4787.04,2212.49) 4795.04,2212.49 U5.1@4795.04,2285.12 ; U2.1@4945.55,3193.36 5029.45,3193.36 C6.1@5031.18,3191.63 5031.18,3366.02 4979.84,3417.36 ; U8.1@5286.61,2968.31 5333.53,2968.31 5343.31,2958.53 C23.1@5343.31,2958.31 ; C23.1@5345.75,2956.19 5370.6,2956.19 5377.66,2963.25 ccw(c5372,2968.9) 5380,2968.9 5380,3133.89 ccw(c5372,3133.89) 5377.66,3139.55 5343.31,3173.9 5343.31,3328.9 5254.84,3417.36 4979.84,3417.36 ; U15.6@6703.94,421.3 6770.43,421.3 C47.1@6777.44,428.31 6839.57,428.31 C34.2@6847.44,420.43 7205.91,420.43 7217.44,408.9 ; P8.6@7057.44,653.9 7212.44,653.9 7217.44,648.9 ; 7143.98,255.43 7147.44,258.9
  Top Layer w10: U12.6@3285.08,3547.36 3285.08,3612.13
  Top Layer w12: 2637.44,509.76 2637.44,746.9 cw(c2649.44,746.9) 2649.44,758.9 2734.49,758.9 2753.9,739.49 C27.1@2753.9,698.9 ; C37.2@3270.91,3662.36 3270.91,3626.3 3285.08,3612.13
  Top Layer w15: C3.1@3899.25,3807.36 P15.3@4122.44,3807.36
  Top Layer w20: 4122.44,3723.03 P15.3@4122.44,3807.36
  Top Layer w30: C37.2@3270.91,3662.36 3270.91,4256.5
  Top Layer w50: 2637.44,509.76 2778.31,368.9 v4(2778.31,8.9) ; 3270.91,4256.5 3321.16,4306.75 3512.6,4306.75 ; L1.2@3483.31,4154.72 3483.31,4277.46 3512.6,4306.75 ; L1.2@3609.29,4154.72 3609.29,4285.59 3630.45,4306.75 ; P3.Vin@3958.31,1693.9 3958.31,1968.9 3958.31,3417.36 3958.31,3538.29 cw(c4008.31,3538.19) 3972.86,3573.45 ; 4122.44,3701.4 7134.94,3701.4 7217.44,3618.9 7217.44,648.9 7217.44,408.9 7217.44,328.9 7147.44,258.9 ; 4122.44,3723.03 3972.86,3573.45 ; v4(6108.31,-1121.1) 6123.31,-1106.1 6123.31,-111 cw(c6173.31,-111.1) 6173.21,-61.1 6806.73,-61.1 ccw(c6806.73,-11.1) 6842.09,-46.46 7143.98,255.43 ; 3512.6,4306.75 3630.45,4306.75 ; 3630.45,4306.75 3709.74,4306.75 cw(c3709.74,4256.75) 3745.1,4292.11 3816.76,4220.45 cw(c3781.4,4185.09) 3831.4,4185.09 3831.4,3714.91 3972.86,3573.45
  Bottom Layer w50: v4(2778.31,8.9) 2778.31,-11.1 3048.36,-281.15 3063.31,-296.1 3898.31,-296.1 3998.31,-396.1 v2(4168.31,-396.1) 4173.31,-401.1 4173.31,-1066.1 4228.31,-1121.1 v4(6108.31,-1121.1)
VPPS: P10.1 R17.1 R18.2 | length 4631.8
  Top Layer w6: v2(4543.31,3528.9) 5316.1,3528.9 5455,3390 5455,2830 5290,2665 5290,2265 5030,2005 R18.2@5030,598.46 R17.1@5090,598.46
  Bottom Layer w8: P10.1@4543.31,2893.9 v2(4543.31,3528.9)
VSENS: P3.A14 R1.1 R2.2 | length 645
  Top Layer w8: R1.1@3506.69,4.57 R2.2@3591.69,4.57 3694.57,4.57 v2(3730,40)
  Bottom Layer w8: v2(3730,40) 3730,185 3858.31,313.31 P3.A14@3858.31,393.9
VSOLAR: C42.2 D1.A D2.1 P24.1 P25.1 | length 1247.9
  Top Layer w8: D2.1@571.69,4855.47 D2.1@582.44,4844.72 ; C42.2@756.34,4844.72 C42.2@757.44,4845.83 ; D1.A@914.29,4845.83 D1.A@917.44,4848.98
  Top Layer w15: D2.1@582.44,4844.72 C42.2@756.34,4844.72 ; C42.2@757.44,4845.83 D1.A@914.29,4845.83
  Top Layer w20: P25.1@287.44,4855.47 D2.1@571.69,4855.47
  Top Layer w50: P24.1@277.44,4422.36 275.71,4424.09 205.91,4424.09 175,4455 175,4826.18 204.29,4855.47 P25.1@287.44,4855.47
pads on no net: J1.S1 J1.S2 J2.S1 J2.S2 P1.3 P1.5 P1.7 P1.8 P1.10 P1.11 P1.12 P1.13 P1.15 P1.16 P1.17 P1.18 P1.22 P1.26 P1.27 P1.28 P1.29 P1.31 P1.32 P1.33 P1.35 P1.36 P1.37 P2.0 P3.3.3V2 P3.AGND P3.AREF P3.GND2 P3.VBat P9.6 P9.9 P13.2 P13.4 P13.8 P13.10 P15.1 P21.2 U1.7 U1.12 U1.25 U3.2 U3.4 U3.6 U3.8 U3.9 U3.11 U3.12 U3.16 U3.17 U3.18 U3.19 U3.22 U3.28 U6.3 U6.8 U6.9 U6.10 U6.11 U7.7 U7.8 U8.4 U11.8 U12.10 U12.12 U12.16 U13.8 U14. U14.1 U14.3 U14.5 U14.6 U14.7 U14.8 U14.10 U14.12 U14.14 U14.16 U14.17 U14.19 U14.20 U14.22 U14.23 U14.24 U14.25 U14.28 U14.30 U14.31 U14.32 U14.33 U14.36 U14.38 U14.42 U14.44 U14.45 U14.46 U14.47 U14.48 U14.49 U14.51 U15.4 U15.7
copper on no net: | length 100
  Top Layer w10: 4103.31,3203.9 4203.31,3203.9

## Polygon pours and split planes (outlines as drawn)
DGND on Bottom Layer "DGND_L04_P001" (solid, pour order 1): 4390,-5 4395,0 5755,0 5755,-1005 5750,-1010 4390,-1010
DGND on Bottom Layer "DGND_L04_P003" (solid, remove dead copper, pour order 3): 5612.44,3403.9 7147.44,3403.9 7147.44,298.9 6957.44,108.9 6957.44,103.9 5617.44,103.9 5612.44,108.9
DGND on Top Layer "DGND_L01_P000" (solid, pour order 0): 4395,-5 4400,-10 5755,-10 5755,-1000 5745,-1010 4390,-1010
DGND on Top Layer "DGND_L01_P002" (solid, remove dead copper, pour order 2): 5612.44,3408.9 5617.44,3403.9 7147.44,3403.9 7147.44,298.9 6957.44,108.9 5612.44,108.9
3V3 on Layer 2 (split plane): 325 vertices, not listed, extent -227.46,-1232.54 7482.34,6477.27
VCC_TILE on Layer 2 (split plane): 6947.34,174 5627.54,174 5627.54,3083.8 6947.34,3083.8
3V3 on Layer 2 (split plane): 5492.34,1754 4225.42,1754 4158.41,1821.01 4158.41,3301.79 4296.91,3440.29 4298.02,3441.95 4298.41,3443.9 4298.41,4351.79 4515.42,4568.8 5492.34,4568.8
DGND on Layer 1 (split plane): 325 vertices, not listed, extent -227.46,-1232.54 7482.34,6477.27
DGND on Layer 1 (split plane): 6947.34,174 5627.54,174 5627.54,3083.8 6947.34,3083.8
AGND on Layer 1 (split plane): 5492.34,1754 4225.42,1754 4158.41,1821.01 4158.41,3301.79 4296.91,3440.29 4298.02,3441.95 4298.41,3443.9 4298.41,4351.79 4515.42,4568.8 5492.34,4568.8

## Other copper
Layer 1 (plane layer: these items are gaps in the copper):
  lines w10: 4153.31,1818.9 4223.31,1748.9 5497.44,1748.9 5497.44,4573.9 4513.31,4573.9 4293.31,4353.9 4293.31,3443.9 4153.31,3303.9 4153.31,1818.9 ; 5622.44,168.9 6952.44,168.9 6952.44,3088.9 5622.44,3088.9 5622.44,168.9
Layer 2 (plane layer: these items are gaps in the copper):
  lines w10: 4153.31,1818.9 4223.31,1748.9 5497.44,1748.9 5497.44,4573.9 4513.31,4573.9 4293.31,4353.9 4293.31,3443.9 4153.31,3303.9 4153.31,1818.9 ; 5622.44,168.9 6952.44,168.9 6952.44,3088.9 5622.44,3088.9 5622.44,168.9

## Silkscreen, mask and mechanical layers (free items; w line width, h text height)
Top Overlay:
  drawing of 38 lines, arcs and shapes, not listed
  text "Medusa-AI v3.21" at 1043.31,6206.12 h200
  text "loggerhead.com" at 1043.31,5966.08 h160
  text "medusa@loggerhead.com" at 1043.46,5724.11 h160
  text "+-" at 3341.66,5135 h100 r90
  text "+-" at 3681.66,5135 h100 r90
  text "+   -" at 4172.44,5097.36 h60 r90
  text "+ -" at -80,4930 h100 r270
  text "Solar" at 52.44,4912.36 h60 r270
  text "Battery" at 3435,4812.58 h200
  text "+ -" at -80,4505 h100 r270
  text "Solar" at 62.44,4482.36 h60 r270
  text "OFF" at 4185.22,4292.36 h200 r90
  text "3V3" at 1586.78,4153.9 h60 r90
  text "GND" at 1691.78,4148.9 h60 r90
  text "4V2" at 2002.44,4148.9 h60 r90
  text "FAULT" at 1869.33,4140 h60 r90
  text "SOLAR" at 572.44,4086.12 h200
  text "VCC5" at 2835,3855 h60
  text "CHG" at 1796.78,3778.9 h60 r90
  text "+ -" at 2755,3555 h100 r90
  text "SWARM" at 6200,3471.11 h100
  text "ON" at 4215.22,3402.36 h200 r90
  text "Coral Dev Board Mini" at 1297.22,3185 h200 r270
  text "-" at 4062.44,2863.9 h60 r90
  text "S" at 4057.44,2763.9 h60 r90
  text "RIGHT" at 3918.31,2658.9 h60 r90
  text "+" at 4017.44,2648.9 h60
  text "Jump  / PPS To ADC" at 4668.31,2503.9 h100 r90
  text "-" at 4062.43,2358.9 h60 r90
  text "S" at 4057.44,2258.9 h60 r90
  text "LEFT" at 3923.31,2158.9 h60 r90
  text "+" at 4017.45,2138.9 h60
  text "Switch" at -215,1696.11 h100
  text "Coral 3V3" at -205,1605.67 h60
  text "Rx" at 7310,1180 h60 r180
  text "RI" at 7295,985 h60 r180
  text "Iridium" at 7391.02,955 h100 r270
  text "Tx" at 7310,880 h60 r180
  text "Slp" at 7320,779.34 h60 r180
  text "4V2" at 7340,680 h60 r180
  text "G" at 7290,569.33 h60 r180
  text "D" at 2925,-1140 h60 r180
  text "C" at 3035,-1140.67 h60 r180
  text "G" at 3130,-1140.67 h60 r180
  text "3V3" at 3270,-1140.67 h60 r180
Mechanical 1:
  drawing of 168 lines, arcs and shapes, not listed
Mechanical 13:
  lines w10: 4393.31,-1001.1 5753.31,-1001.1 5753.31,-6.1 4393.31,-6.1 4393.31,-1001.1

## Text inside footprints (layer, text, board x,y; h text height)
C2: Top Overlay "+" at 3993.31,3783.9 h19.68 r270
C31: Top Overlay "+" at 4323.31,-816.1 h19.68 r270
P1: Top Overlay "40" at 2440,3285 h50 r270; Top Overlay "39" at 2068.31,3338.9 h50 r270; Top Overlay "2" at 2440,1140 h50 r270; Top Overlay "1" at 2090,1150 h50 r270
P11: Top Overlay "5" at 1542.44,623.9 h50; Top Overlay "1" at 1202.44,523.9 h50; Top Overlay "8" at 1182.44,623.9 h50; Top Overlay "3" at 1542.44,523.9 h50
P12: Top Overlay "MI" at 752.44,503.9 h50; Top Overlay "CS" at 752.44,603.9 h50; Top Overlay "CLK" at 347.44,603.9 h50; Top Overlay "MO" at 387.44,503.9 h50
P13: Bottom Overlay "10" at 2040,3985 h50 r180; Bottom Overlay "9" at 2040,4085 h50 r180; Bottom Overlay "1" at 1500,4085 h50 r180; Bottom Overlay "2" at 1480,3985 h50 r180